# Altium PCB PCB-v3.PcbDoc
Units mm, origin at the board's own origin, x right, y up, seen from the top; angles counter-clockwise.
Board outline 31.7 x 33.1 mm, 2 copper layers (Top Layer, Bottom Layer); 47 components, 31 nets, 206 pads, 13 vias.
Unrouted connection lines stored in the file: 46.
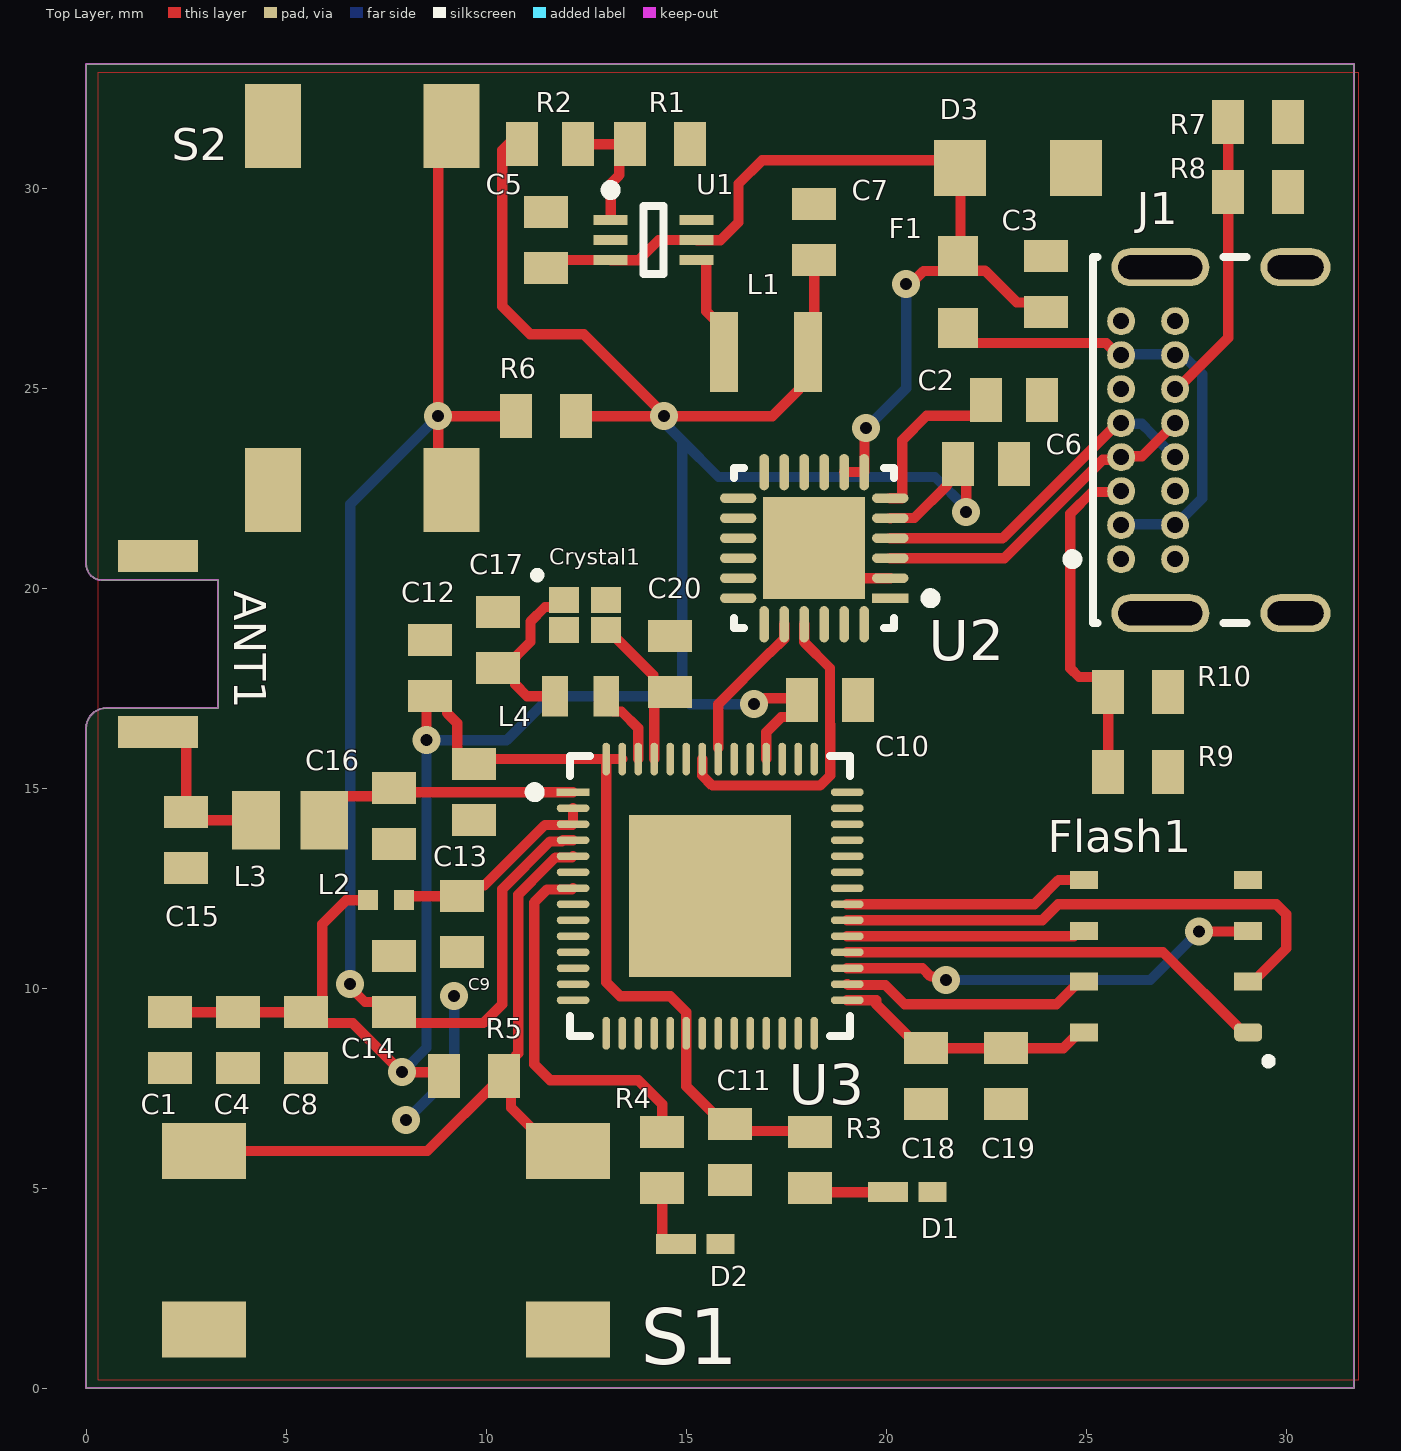
[diagram p0: Top Layer view]
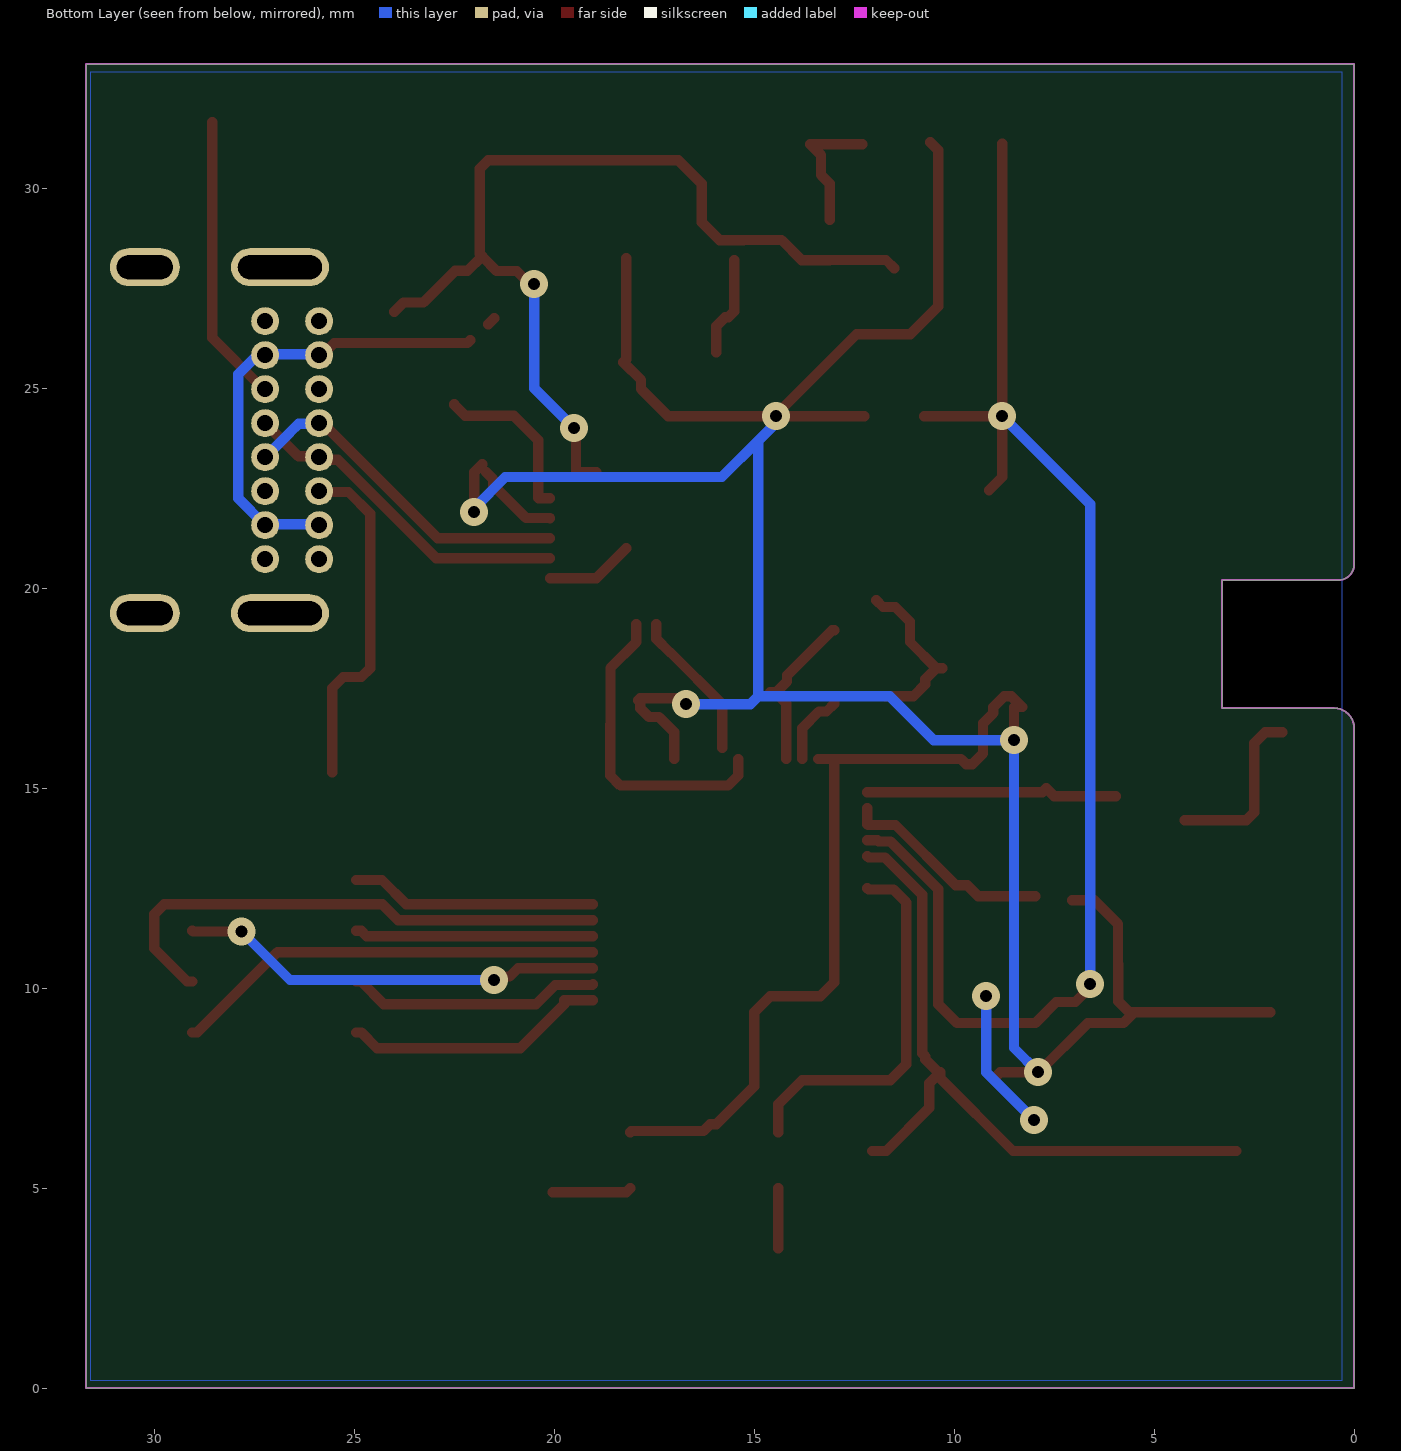
[diagram p1: Bottom Layer view, seen from below]

## Layer stack, top to bottom
Top Solder: solder mask 0.0102, Solder Resist, Dk 3.5
Top Layer: signal copper 0.0356
Dielectric 1: dielectric 0.32, FR-4, Dk 4.8
Bottom Layer: signal copper 0.0356
Bottom Solder: solder mask 0.0102, Solder Resist, Dk 3.5

## Board outline
0,16.5 cw(c0.5,16.5) 0.5,17 3.3,17 3.3,20.2 0.4,20.2 cw(c0.4,20.6) 0,20.6 0,33.1 31.7,33.1 31.7,0 0,0

## Design rules (kind name [scope] priority, off if disabled: settings)
BoardOutlineClearance [All] p1: gap=0.2 ignorepadtopadclearanceinfootprint=FALSE
Clearance [All] p1: gap=0.127 ignorepadtopadclearanceinfootprint=TRUE except(0.254: Arc-Hole Track-Hole SMDPad-Hole THPad-Hole Via-Hole Fill-Hole Poly-Hole Region-Hole Text-Hole)
ComponentClearance [All] p1: gap=0.127 collisioncheckmode=3 verticalgap=0.127 showdistances=TRUE
DiffPairsRouting [All] p1: maxlimit=0.254 minlimit=0.127 mostfreqgap=0.127 toplayer_minwidth=0.127 toplayer_maxwidth=25.4 toplayer_prefwidth=0.127 bottomlayer_minwidth=0.127 bottomlayer_maxwidth=25.4 bottomlayer_prefwidth=0.127 maxuncoupledlength=12.7
Height [All] p1: minheight=0 maxheight=1816.048 prefheight=12.7
HoleSize [All] p1: absolutevalues=TRUE maxlimit=6.3 minlimit=0.3 maxpercent=80.000 minpercent=20.000
HoleToHoleClearance [All] p1: gap=0.254 allowstackedmicrovias=FALSE
MinimumAnnularRing [All] p1: minimumring=0.152
MinimumSolderMaskSliver [All] p1: minsoldermaskwidth=0.152
PlaneClearance [All] p1: clearance=0.127
PlaneConnect PlaneConnectPowerPads [InPadClass('PowerPads')] p1: planeconnectstyle=Direct reliefexpansion=0.508 reliefentries=4 reliefconductorwidth=0.254 reliefairgap=0.254
PlaneConnect [All] p2: pad.planeconnectstyle=Relief pad.reliefexpansion=0.3 pad.reliefentries=4 pad.reliefconductorwidth=0.127 pad.reliefairgap=0.127 via.planeconnectstyle=Direct via.reliefexpansion=0.3 via.reliefentries=4 via.reliefconductorwidth=0.127 via.reliefairgap=0.127
PolygonConnect PolygonConnectPowerPads [All vs (InPadClass('PowerPads'))] p1: connectstyle=Direct reliefconductorwidth=0.254 reliefentries=4 polygonreliefangle="90 Angle" airgapwidth=0.254
PolygonConnect [All] p2: thpad.connectstyle=Relief thpad.reliefconductorwidth=0.127 thpad.reliefentries=4 thpad.polygonreliefangle="90 Angle" thpad.airgapwidth=0.127 smdpad.connectstyle=Relief smdpad.reliefconductorwidth=0.127 smdpad.reliefentries=4 smdpad.polygonreliefangle="90 Angle" smdpad.airgapwidth=0.127 via.connectstyle=Direct via.reliefconductorwidth=0.127 via.reliefentries=4 via.polygonreliefangle="90 Angle" via.airgapwidth=0.127
RoutingVias [All] p1: holewidth=0.3 width=0.6 viastyle="Through Hole" minholewidth=0.3 minwidth=0.6 maxholewidth=0.6 maxwidth=6.6
SilkToSilkClearance [All] p1: silktosilkclearance=0.127
SilkToSolderMaskClearance [IsPad] p1: minsilkscreentomaskgap=0.127 clearancetoexposedcopper=TRUE
SolderMaskExpansion [All] p1: expansion=0.051 istentingtop=FALSE
SupplyNets "Schematic Supply Nets_4" [InNet('+3.3V')] p1: voltage=0.000
SupplyNets "Schematic Supply Nets_1" [InNet('GND')] p2: voltage=0.000
UnRoutedNet [All] p1: checkbadconnections=TRUE
Width Width_10mil [All] p1: maxlimit=25.4 minlimit=0.254 preferedwidth=0.254 minimp=50.000000 maximp=50.000000 favimp=50.000000
Width Width_6mil [All] p2: maxlimit=25.4 minlimit=0.152 preferedwidth=0.152 minimp=50.000000 maximp=50.000000 favimp=50.000000
Width Power_20mil [All] p3: maxlimit=25.4 minlimit=0.508 preferedwidth=0.508 minimp=50.000000 maximp=50.000000 favimp=50.000000
Width Power_12mil [All] p4: maxlimit=25.4 minlimit=0.305 preferedwidth=0.305 minimp=50.000000 maximp=50.000000 favimp=50.000000
Width Width_5mil [All] p5: maxlimit=25.4 minlimit=0.127 preferedwidth=0.127 minimp=50.000000 maximp=50.000000 favimp=50.000000
19 further rules are at their usual default settings.

## Components (designator, comment, footprint, x,y, rotation, side; value= is the part's Value field where it differs from the comment)
ANT1 "PCB_ANT" "Antenne // RFANT5220110A0T" 1.8,18.6 r90 top
C1 "10µF" CAP_General_0603 2.1,8.7 r90 top
C2 "1µF" CAP_General_0603 23.2,24.7 r0 top
C3 "10pF" CAP_General_0603 24,27.6 r270 top
C4 "1µF" CAP_General_0603 3.8,8.7 r90 top
C5 "4.7µF" CAP_General_0603 11.5,28.7 r270 top
C6 "1µF" CAP_General_0603 22.5,23.1 r0 top
C7 "1µF" CAP_General_0603 18.2,28.9 r270 top
C8 "0.1µF" CAP_General_0603 5.5,8.7 r90 top
C9 "0.1µF" CAP_General_0603 9.4,11.6 r90 top
C10 "0.1µF" CAP_General_0603 18.6,17.2 r0 top
C11 "0.1µF" CAP_General_0603 16.1,5.9 r90 top
C12 "1µF" CAP_General_0603 8.6,18 r270 top
C13 "10nF" CAP_General_0603 9.7,14.9 r90 top
C14 "0.1µF" CAP_General_0603 7.7,10.1 r270 top
C15 "2.7pF" CAP_General_0603 2.5,13.7 r90 top
C16 "2.7pF" CAP_General_0603 7.7,14.3 r90 top
C17 "10pF" CAP_General_0603 10.3,18.7 r90 top
C18 "0.1µF" CAP_General_0603 21,7.8 r90 top
C19 "10µF" CAP_General_0603 23,7.8 r90 top
C20 "10pF" CAP_General_0603 14.6,18.1 r90 top
Crystal1 "Crystal" "Crystal // ECS­400­8­47B2­CKM­TR" 12.475,19.325 r0 top
D1 "LED" "LED // KRDELPS1.22-UIVG-46-H3Q4-XX" 20.6,4.9 r0 top
D2 "LED" "LED // KRDELPS1.22-UIVG-46-H3Q4-XX" 15.3,3.6 r0 top
D3 "ESD diode 5V" "ESD diode 5V // SMF5.0A" 23.3,30.5 r0 top
F1 "Fuse" "Fuse // 0603L050SLYR" 21.8,27.4 r90 top
Flash1 "128 Mbit NOR Flash" "128 Mbit NOR Flash // AT25QF128A-MHB-T" 27,10.8 r180 top
J1 "USB4085-GF-A" "USB-C connector // USB4085-GF-A" 29.9,23.7 r90 top
L1 "1µH" "Inductor 1µH // MLP2520H1R0MT0S1" 17,25.9 r0 top
L2 "2nH" "Inductor 2nH // MLG1005S2N0BTD25" 7.5,12.2 r0 top
L3 "3.3nH" "Inductor 3.3nH // AIMC-0805-3N3" 5.1,14.2 r0 top
L4 "24nH" "Inductor 24 nH // 36501J24NJTDG" 12.36,17.3 r0 top
R1 "100K" RES_100K_0603 14.35,31.1 r180 top
R2 "453K" RES_453K_0603 11.6,31.1 r180 top
R3 "499R" RES_499R_0603 18.1,5.7 r270 top
R4 "499R" RES_499R_0603 14.4,5.7 r270 top
R5 "10K" RES_10K_0603_1 9.7,7.8 r0 top
R6 "10K" RES_10K_0603_1 11.5,24.3 r0 top
R7 "10K" RES_10K_0603_1 29.3,31.65 r180 top
R8 "10K" RES_10K_0603_1 29.3,29.9 r180 top
R9 "10K" RES_10K_0603_1 26.3,15.4 r180 top
R10 "10K" RES_10K_0603_1 26.3,17.4 r180 top
S1 "Drukknop" "Tactile Switches // FSM4JSMAATR" 7.5,3.7 r90 top
S2 "Drukknop" "Tactile Switches // FSM4JSMAATR" 6.9,27 r0 top
U1 "Convertor // 5.5V-3.3V" "CONVERTOR // TLV62569APDRLR" 14.188,28.704 r0 top
U2 "CP2102N-A02-GQFN24R" "USB Bridge // CP2102N-A02-GQFN24R" 18.2,21 r180 top
U3 "ESP32-S3R8" FP-ESP32-S3R8 15.6,12.3 r0 top

## Footprints (in the part's own frame and the unit in brackets; to place one, negate y for a bottom-side part, rotate by r counter-clockwise, add the part's x,y. Pads: shape width x height; smd on the part's side, far side on the other; paste and mask are expansions set on the pad)
"128 Mbit NOR Flash // AT25QF128A-MHB-T" [mm]
  rrect50% 0.7x0.45 smd: 1(-2.05,1.905)
  rect 0.7x0.45 smd: 2(-2.05,0.635) 3(-2.05,-0.635) 4(-2.05,-1.905) 5(2.05,-1.905) 6(2.05,-0.635) 7(2.05,0.635) 8(2.05,1.905)
  silkscreen extent -2.64,2.55 -2.48,2.71
"Antenne // RFANT5220110A0T" [mm]
  rect 0.8x2 smd: 1(-2.2,0) 2(2.2,0)
CAP_General_0603 [mm] "Chip Capacitor, 2-Leads, Body 1,60x0,80mm, IPC Medium Density"
  rect 0.8x1.1 smd: 1(-0.7,0) 2(0.7,0)
  body extent -0.85,-0.45 0.85,0.45, height 0.7
"CONVERTOR // TLV62569APDRLR" [mm] "SOT23, 6-Leads, Body 1,60x2,15mm, Pitch 0,50mm, IPC Medium Density"
  rect 0.85x0.25 smd mask+0.04: 1(-1.075,0.5) 2(-1.075,0) 3(-1.075,-0.5) 4(1.075,-0.5) 5(1.075,0) 6(1.075,0.5)
  silkscreen extent -1.2,-0.85 0.25,1.37, body extent -0.65,-0.85 0.65,0.85, height 0.6
"Crystal // ECS­400­8­47B2­CKM­TR" [mm] "40 MHz Crystal"
  rect 0.75x0.65 smd: 1(-0.525,0.375) 2(-0.525,-0.375) 3(0.525,-0.375) 4(0.525,0.375)
  silkscreen extent -1.28,0.92 -1.12,1.08
"ESD diode 5V // SMF5.0A" [mm]
  rect 1.3x1.4 smd: 1(-1.45,0) 2(1.45,0)
FP-ESP32-S3R8 [mm]
  rect 0.818x0.192 smd paste+0 mask+0: 1(-3.427,2.6)
  rrect100% 0.818x0.192 smd paste+0 mask+0: 2(-3.427,2.2) 3(-3.427,1.8) 4(-3.427,1.4) 5(-3.427,1) 6(-3.427,0.6) 7(-3.427,0.2) 8(-3.427,-0.2) 9(-3.427,-0.6) 10(-3.427,-1) 11(-3.427,-1.4) 12(-3.427,-1.8) 13(-3.427,-2.2) 14(-3.427,-2.6) 29(3.427,-2.6) 30(3.427,-2.2) 31(3.427,-1.8) 32(3.427,-1.4) 33(3.427,-1) 34(3.427,-0.6) 35(3.427,-0.2) 36(3.427,0.2) 37(3.427,0.6) 38(3.427,1) 39(3.427,1.4) 40(3.427,1.8) 41(3.427,2.2) 42(3.427,2.6)
  rrect100% 0.192x0.818 smd paste+0 mask+0: 15(-2.6,-3.427) 16(-2.2,-3.427) 17(-1.8,-3.427) 18(-1.4,-3.427) 19(-1,-3.427) 20(-0.6,-3.427) 21(-0.2,-3.427) 22(0.2,-3.427) 23(0.6,-3.427) 24(1,-3.427) 25(1.4,-3.427) 26(1.8,-3.427) 27(2.2,-3.427) 28(2.6,-3.427) 43(2.6,3.427) 44(2.2,3.427) 45(1.8,3.427) 46(1.4,3.427) 47(1,3.427) 48(0.6,3.427) 49(0.2,3.427) 50(-0.2,3.427) 51(-0.6,3.427) 52(-1,3.427) 53(-1.4,3.427) 54(-1.8,3.427) 55(-2.2,3.427) 56(-2.6,3.427)
  rect 4.05x4.05 smd paste-1000 mask+0: 57(0,0)
  silkscreen extent -4.51,-3.5 3.5,3.5, body extent -4.1,-4.09 4.07,4.09, height 0.25
"Fuse // 0603L050SLYR" [mm]
  rect 1x1 smd: 1(-0.9,0) 2(0.9,0)
"Inductor 1µH // MLP2520H1R0MT0S1" [mm]
  rect 0.7x2 smd: 1(-1.05,0) 2(1.05,0)
"Inductor 2nH // MLG1005S2N0BTD25" [mm]
  rect 0.5x0.5 smd: 1(-0.45,0) 2(0.45,0)
"Inductor 3.3nH // AIMC-0805-3N3" [mm] "Chip Inductor, 2-Leads, Body 2,00x1,25mm, IPC Medium Density"
  rect 1.19x1.47 smd: 1(-0.855,0) 2(0.855,0)
  body extent -1.1,-0.72 1.1,0.72, height 1.05
"Inductor 24 nH // 36501J24NJTDG" [mm]
  rect 0.64x1.02 smd: 1(-0.64,0) 2(0.64,0)
"LED // KRDELPS1.22-UIVG-46-H3Q4-XX" [mm]
  rect 1x0.5 smd mask+0.05: 1(-0.557,0)
  rect 0.7x0.5 smd mask+0.05: 2(0.557,0)
RES_10K_0603_1 [mm] "Chip Resistor, 2-Leads, Body 1,55x0,80mm, IPC Medium Density"
  rect 0.8x1.1 smd: 1(-0.75,0) 2(0.75,0)
  body extent -0.83,-0.45 0.82,0.45, height 0.55
RES_100K_0603 [mm] "Chip Resistor, 2-Leads, Body 1,60x0,80mm, IPC Medium Density"
  rect 0.8x1.1 smd: 1(-0.75,0) 2(0.75,0)
  body extent -0.9,-0.5 0.9,0.5, height 0.65
RES_453K_0603 [mm] "Chip Resistor, 2-Leads, Body 1,55x0,80mm, IPC Medium Density"
  rect 0.8x1.1 smd: 1(-0.7,0) 2(0.7,0)
  body extent -0.83,-0.45 0.82,0.45, height 0.55
RES_499R_0603 [mm] "Chip Resistor, 2-Leads, Body 1,55x0,85mm, IPC Medium Density"
  rect 0.8x1.1 smd: 1(-0.7,0) 2(0.7,0)
  body extent -0.8,-0.48 0.8,0.47, height 0.55
"Tactile Switches // FSM4JSMAATR" [mm]
  rect 1.4x2.1 smd: 1(2.23,4.55) 2(2.23,-4.55) 3(-2.23,4.55) 4(-2.23,-4.55)
"USB Bridge // CP2102N-A02-GQFN24R" [mm]
  rect 0.91x0.239 smd paste+0 mask+0: 1(-1.901,1.25)
  rrect100% 0.91x0.239 smd paste+0 mask+0: 2(-1.901,0.75) 3(-1.901,0.25) 4(-1.901,-0.25) 5(-1.901,-0.75) 6(-1.901,-1.25) 13(1.901,-1.25) 14(1.901,-0.75) 15(1.901,-0.25) 16(1.901,0.25) 17(1.901,0.75) 18(1.901,1.25)
  rrect100% 0.239x0.91 smd paste+0 mask+0: 7(-1.25,-1.901) 8(-0.75,-1.901) 9(-0.25,-1.901) 10(0.25,-1.901) 11(0.75,-1.901) 12(1.25,-1.901) 19(1.25,1.901) 20(0.75,1.901) 21(0.25,1.901) 22(-0.25,1.901) 23(-0.75,1.901) 24(-1.25,1.901)
  rect 2.55x2.55 smd paste-1000 mask+0: 25(0,0)
  silkscreen extent -3.03,-2 2,2, body extent -2.61,-2.61 2.61,2.61, height 0.25
"USB-C connector // USB4085-GF-A" [mm]
  rrect100% 0.95x2.45 hole 2.1 slot 0.6 at 0 deg paste-2539.97 mask+0: 1(-4.325,3.045) 2(4.325,3.045)
  rrect100% 0.95x1.75 hole 1.4 slot 0.6 at 0 deg paste-2539.97 mask+0: 3(-4.325,-0.335) 4(4.325,-0.335)
  round 0.7 hole 0.4 paste-2539.97 mask+0: A1(-2.975,4.025) A4(-2.125,4.025) A5(-1.275,4.025) A6(-0.425,4.025) A7(0.425,4.025) A8(1.275,4.025) A9(2.125,4.025) A12(2.975,4.025) B1(2.975,2.675) B4(2.125,2.675) B5(1.275,2.675) B6(0.425,2.675) B7(-0.425,2.675) B8(-1.275,2.675) B9(-2.125,2.675) B12(-2.975,2.675)
  silkscreen extent -4.57,0.89 4.57,5.37, body extent -4.87,-4.83 4.87,4.83, height 0.25

## Part data
ANT1: library part "Antenne // RFANT5220110A0T"
C1 C2 C3 C4 C5 C6 C7 C8 C9 C10 C11 C12 C13 C14 C15 C16 C17 C18 C19 C20: library part CAP_General_0603, "Capacitor SMD 0603 ?pF"
Crystal1: library part "Crystal // ECS­400­8­47B2­CKM­TR"
D1 D2: library part "LED // KRDELPS1.22-UIVG-46-H3Q4-XX"
D3: library part "ESD diode 5V // SMF5.0A"
F1: library part "Fuse // 0603L050SLYR"
Flash1: library part "128 Mbit NOR Flash // AT25QF128A-MHB-T"
J1: library part "USB-C connector // USB4085-GF-A", "CONN RCPT USB2.0 TYPE C 24POS RA", Contact Material="Copper Alloy", Contact Plating=Gold, Gender=Receptacle, Number of Positions=16, Orientation="Right Angle", USB Standard="USB 2.0"
L1: library part "Inductor 1µH // MLP2520H1R0MT0S1"
L2: library part "Inductor 2nH // MLG1005S2N0BTD25"
L3: library part "Inductor 3.3nH // AIMC-0805-3N3"
L4: library part "Inductor 24 nH // 36501J24NJTDG"
R1: library part RES_100K_0603, "Resistor SMD 0603 100K"
R2: library part RES_453K_0603, "Resistor SMD 0603 453K"
R3 R4: library part RES_499R_0603, "Resistor SMD 0603 499R"
R5 R6 R7 R8 R9 R10: library part RES_10K_0603_1, "Resistor SMD 0603 10K"
S1 S2: library part "Tactile Switches // FSM4JSMAATR"
U1: library part "Convertor // TLV62569APDRLR"
U2: library part "USB Bridge // CP2102N-A02-GQFN24R", "IC USB TO UART BRIDGE QFN24", Ambient Temperature Range High=85°C, Manufacturer Lifecycle Status="FULL PRODUCTION", Max Junction Temperature (Tj)=105°C, Max Supply Voltage=3.6V, Min Operating Temperature=-40°C, Min Supply Voltage=1.71V, Height=800µm, Interface="I2C, RS-485, UART, USB", Lifecycle Status=Production, Max Operating Temperature=85°C, NexarPartId=99772192, Number of Digital IO=4, Schedule B="8542390000, 8542390000|8542390000|8542390000|8542390000|8542390000"
U3: library part ESP32-S3, "ESP32-S3R8 RF System on a Chip - SoC SMD IC, Dual-Core MCU, Wi-Fi 2.4G BLE 5.0 Combo", NexarPartId=118292493

## Via types
v1: diameter 0.7, hole 0.3, Top Layer to Bottom Layer, tented both sides, 13 vias

## Nets (pads, with @x,y where several pads share a name; then routed paths per layer and width w, separated by ;. In a path a pad name is that pad's centre, name@x,y a point inside that pad or via, vN(x,y) a via of type N, cw(c..) or ccw(c..) an arc to the next point about the centre after c; other vN are vias at no path point)
+3.3V: C1.2 C4.2 C6.1 C7.2 C8.2 C10.1 C11.2 C12.2 C13.2 L1.2 L2.1 R2.2 R3.1 R5.1 R6.2 U2.5 U3.20 U3.46 U3.55 U3.56 | length 89.9
  Top Layer w0.254: C1.2 C4.2 C8.2 ; L2.1 6.5,12.2 5.902,11.602 5.902,10.602 5.9,10.6 5.9,9.673 5.627,9.4 C8.2 ; v1(8.504,16.2) 8.504,17.027 8.3,17.027 8.573,17.3 C12.2 8.75,17.3 9.023,17.027 9.023,16.877 9.277,16.623 9.277,15.873 9.55,15.6 C13.2 9.827,15.727 U3.56 ; R5.1 8.85,7.9 v1(7.9,7.9) 7.891,7.9 6.664,9.127 5.773,9.127 C8.2 ; R2.2@10.6,31.15 10.4,30.95 10.4,27.049 11.1,26.349 12.442,26.349 14.392,24.399 v1@14.392,24.371 ; R6.2 14.3,24.3 v1(14.45,24.3) 17.151,24.3 17.827,24.976 17.827,25.204 L1.2@18.273,25.65 ; U3.55 U3.56 ; v1(16.7,17.1) 16.821,17.1 16.971,17.25 C10.1@17.85,17.25 ; U3.46 17,16.4 17.377,16.777 17.627,16.777 17.85,17 C10.1@17.85,17.25 ; C10.1 C10.1@17.85,17.25 ; R3.1 18.073,6.427 16.273,6.427 C11.2 15.95,6.6 15,7.55 U3.20 15,9.4 14.6,9.8 13.349,9.8 13,10.149 U3.56 ; L1.2@18.2,25.723 18.2,25.946 C7.2 C7.2@18.2,28.25 ; U2.5 20.109,21.757 20.707,21.757 21.527,22.577 21.527,22.727 C6.1@21.7,22.9 ; C6.1 22,22.9 v1(22,21.9)
  Bottom Layer w0.254: v1(7.9,7.9) 8.504,8.504 v1(8.504,16.2) 10.51,16.2 11.61,17.3 14.9,17.3 ; v1@14.3,24.3 14.3,24.287 14.9,23.687 ; v1(16.7,17.1) 15.1,17.1 14.9,17.3 ; v1(22,21.9) 22,22 21.222,22.778 15.808,22.778 14.9,23.687 ; 14.9,17.3 14.9,23.687
+5V: C3.2 C5.2 D3.1 F1.2 U1.3 U1.5 U2.7 U2.8 | length 24.3
  Top Layer w0.254: C5.2 11.704,28.204 U1.3 ; U1.3@13.117,28.2 13.809,28.2 14.313,28.704 U1.5 ; U1.5@15.267,28.7 15.859,28.7 16.309,29.15 16.309,30.109 16.9,30.7 21.65,30.7 D3.1 ; U2.8 U2.7 19.457,22.909 19.457,23.957 v1(19.5,24) ; v1(20.5,27.6) 20.603,27.6 20.93,27.927 21.436,27.927 F1.2@21.8,28.291 ; D3.1@21.859,30.491 21.859,28.359 F1.2 22.165,27.935 22.474,27.935 23.264,27.145 23.764,27.145 C3.2@24,26.909
  Bottom Layer w0.254: v1(19.5,24) 20.5,25 v1(20.5,27.6)
GND: ANT1.2 C1.1 C2.2 C3.1 C4.1 C5.1 C6.2 C7.1 C8.1 C9.1 C10.2 C11.1 C12.1 C13.1 C14.1 C15.1 C16.1 C17.2 C18.1 C19.1 C20.2 Crystal1.2 Crystal1.4 D1.2 D2.2 D3.2 Flash1.4 J1.1 J1.2 J1.3 J1.4 J1.A1 J1.A12 J1.B1 J1.B12 R1.1 R7.1 R8.1 R9.1 R10.1 S1.3 S1.4 S2.3 S2.4 U1.2 U2.2 U2.25 U3.57 | length 5.9
  Top Layer w0.254: v1@9.1,9.8 v1(9.2,9.8) ; U2.25 18.95,20.25 U2.2
  Bottom Layer w0.254: v1(8,6.7) 9.2,7.9 v1(9.2,9.8)
NetANT1_1: ANT1.1 C15.2 L3.1 | length 4.4
  Top Layer w0.254: ANT1.1 2.227,16.4 2.5,16.127 C15.2 2.7,14.2 L3.1
NetC2_1: C2.1 U2.6 | length 4.2
  Top Layer w0.254: U2.6 20.393,22.25 20.4,22.257 20.4,23.7 21.01,24.31 22.227,24.31 22.5,24.583 C2.1@22.5,24.6
NetC9_2: C9.2 L2.2 U3.2 U3.3 | length 5.3
  Top Layer w0.254: L2.2@7.97,12.3 C9.2 9.673,12.573 9.96,12.573 11.468,14.081 12.154,14.081 U3.3 U3.2
NetC14_2: C14.2 R6.1 S2.1 S2.2 U3.4 | length 35.5
  Top Layer w0.254: v1(6.6,10.1) 6.6,10.024 6.972,9.653 7.447,9.653 7.973,9.127 9.927,9.127 10.4,9.6 10.4,12.474 11.595,13.669 11.891,13.669 11.922,13.7 U3.4 ; S2.1@8.8,31.12 v1(8.8,24.3) ; S2.2 8.8,22.78 v1(8.8,24.3) ; R6.1 v1(8.8,24.3)
  Bottom Layer w0.254: v1(6.6,10.1) 6.6,22.1 v1(8.8,24.3)
NetC16_2: C16.2 L3.2 U3.1 | length 6.3
  Top Layer w0.254: L3.2@5.955,14.8 7.5,14.8 C16.2 7.8,14.9 U3.1
NetC17_1: C17.1 Crystal1.1 L4.1 | length 4.3
  Top Layer w0.254: C17.1 C17.1@10.45,18 ; L4.1 11.019,17.3 10.723,17.596 10.723,17.727 C17.1@10.45,18 ; Crystal1.1 11.779,19.529 11.47,19.529 11.104,19.163 11.104,18.654 C17.1@10.45,18
NetC18_2: C18.2 C19.2 Flash1.8 U3.29 | length 6.6
  Top Layer w0.254: U3.29 19.75,9.7 19.75,9.6 20.85,8.5 C18.2 C19.2 24.43,8.5 24.825,8.895 Flash1.8
NetC20_1: C20.1 Crystal1.3 U3.53 | length 4.1
  Top Layer w0.254: Crystal1.3 13.05,18.95 14.177,17.823 14.177,17.673 C20.1@14.45,17.4 ; U3.53 14.2,17.127 14.473,17.4 C20.1
NetD1_1: D1.1 R3.2 | length 2
  Top Layer w0.254: R3.2 18.2,4.9 D1.1
NetD2_1: D2.1 R4.2 | length 1.5
  Top Layer w0.254: D2.1@14.4,3.5 R4.2
NetFlash1_1: Flash1.1 U3.32 | length 10.9
  Top Layer w0.254: U3.32 26.92,10.9 28.925,8.895 Flash1.1
NetFlash1_2: Flash1.2 U3.34 | length 13.4
  Top Layer w0.254: U3.34 23.9,11.7 24.3,12.1 29.751,12.1 30,11.851 30,10.99 29.175,10.165 Flash1.2
NetFlash1_3: Flash1.3 U3.31 | length 10.7
  Top Layer w0.254: U3.31 20.906,10.5 21.117,10.289 21.415,10.289 v1(21.5,10.204) ; v1(27.818,11.418) 29.033,11.418 Flash1.3
  Bottom Layer w0.254: v1(21.5,10.204) 26.604,10.204 v1(27.818,11.418)
NetFlash1_5: Flash1.5 U3.35 | length 6.2
  Top Layer w0.254: U3.35 23.7,12.1 24.305,12.705 Flash1.5
NetFlash1_6: Flash1.6 U3.33 | length 6
  Top Layer w0.254: U3.33 24.69,11.3 24.825,11.435 Flash1.6
NetFlash1_7: Flash1.7 U3.30 | length 6.4
  Top Layer w0.254: U3.30 19.046,10.081 19.975,10.081 20.456,9.6 24.26,9.6 24.825,10.165 Flash1.7
NetJ1_A5: J1.A5 R9.2 R10.2 | length 8.6
  Top Layer w0.254: R9.2 25.55,17.507 25.277,17.78 24.82,17.78 24.6,18 24.6,21.861 25.144,22.405 25.875,22.405 J1.A5@25.885,22.395
NetJ1_A6: J1.A6 J1.B6 U2.3 | length 8.5
  Top Layer w0.254: U2.3 22.95,20.75 25.412,23.212 25.787,23.212 25.875,23.3 26.396,23.3 27.221,24.125 J1.B6
NetJ1_A7: J1.A7 J1.B7 U2.4 | length 8.6
  Top Layer w0.254: U2.4 22.911,21.25 25.761,24.1 J1.A7@25.89,24.1
  Bottom Layer w0.254: J1.A7@25.94,24.15 25.978,24.112 26.388,24.112 26.621,23.879 26.621,23.875 27.221,23.275 J1.B7
NetJ1_B5: J1.B5 R7.2 R8.2 | length 7.2
  Top Layer w0.254: J1.B5@27.29,25 28.55,26.26 R8.2 R7.2
NetL1_1: L1.1 U1.4 | length 2.5
  Top Layer w0.254: U1.4@15.5,28.202 15.5,26.922 15.649,26.773 15.727,26.773 15.95,26.55 L1.1
NetL4_2: L4.2 U3.54 | length 2
  Top Layer w0.254: L4.2 13,17.11 13.193,16.917 13.383,16.917 13.8,16.5 U3.54
NetR1_2: R1.2 R2.1 U1.1 | length 3.4
  Top Layer w0.254: R2.1 R1.2 13.327,30.827 13.327,30.327 13.113,30.113 U1.1
NetR4_1: R4.1 U3.7 | length 9.5
  Top Layer w0.254: U3.7 12.142,12.469 11.524,12.469 11.2,12.145 11.2,8.1 11.6,7.7 13.8,7.7 14.4,7.1 R4.1
NetR5_2: R5.2 S1.1 S1.2 U3.5 | length 17.6
  Top Layer w0.254: S1.1 8.53,5.93 10.35,7.75 R5.2@10.35,7.9 ; S1.2 11.7,5.93 10.623,7.007 10.623,7.627 10.425,7.825 R5.2@10.35,7.9 ; U3.5 12.142,13.269 11.734,13.269 11.51,13.045 10.8,12.335 10.8,8.372 10.723,8.295 10.723,8.223 10.4,7.9 R5.2@10.35,7.9
NetU2_20: U2.20 U3.49 | length 3.8
  Top Layer w0.254: U3.49@15.8,16.009 15.8,17.1 17.09,18.39 17.105,18.39 17.45,18.735 U2.20
NetU2_21: U2.21 U3.50 | length 7.9
  Top Layer w0.254: U3.50 15.4,15.319 15.655,15.064 18.345,15.064 18.6,15.319 18.6,16.591 18.596,16.595 18.596,18.005 17.95,18.651 U2.21
VBus: F1.1 J1.A4 J1.A9 J1.B4 J1.B9 | length 11.7
  Top Layer w0.254: F1.1@21.5,26.75 F1.1@21.65,26.6 ; F1.1@22.1,26.2 22.173,26.127 25.503,26.127 25.805,25.825 J1.A9
  Bottom Layer w0.254: J1.A4@25.94,21.6 J1.B9@27.29,21.6 ; J1.A9@25.94,25.85 27.397,25.85 27.9,25.347 27.9,22.246 27.229,21.575 J1.B9
pads on no net: J1.A8 J1.B8 U1.6 U2.1 U2.9 U2.10 U2.11 U2.12 U2.13 U2.14 U2.15 U2.16 U2.17 U2.18 U2.19 U2.22 U2.23 U2.24 U3.6 U3.8 U3.9 U3.10 U3.11 U3.12 U3.13 U3.14 U3.15 U3.16 U3.17 U3.18 U3.19 U3.21 U3.22 U3.23 U3.24 U3.25 U3.26 U3.27 U3.28 U3.36 U3.37 U3.38 U3.39 U3.40 U3.41 U3.42 U3.43 U3.44 U3.45 U3.47 U3.48 U3.51 U3.52

## Polygon pours and split planes (outlines as drawn)
GND on Top Layer "NONET_L01_P004" (solid, remove dead copper, shelved, pour order 4): 0.3,32.9 31.8,32.9 31.8,0.2 0.3,0.2
GND on Bottom Layer "NONET_L02_P005" (solid, remove dead copper, shelved, pour order 5): 31.6,0.2 0.3,0.2 0.3,32.9 31.6,32.9

## Keep-outs
Keep-Out Layer:
  the board outline again, w0.05